# Altium PCB BMS-PCB.PcbDoc
Units mm, origin at the board's own origin, x right, y up, seen from the top; angles counter-clockwise.
Board outline 75.4 x 38.3 mm, 2 copper layers (Top Layer, Bottom Layer); 125 components, 81 nets, 331 pads, 63 vias.
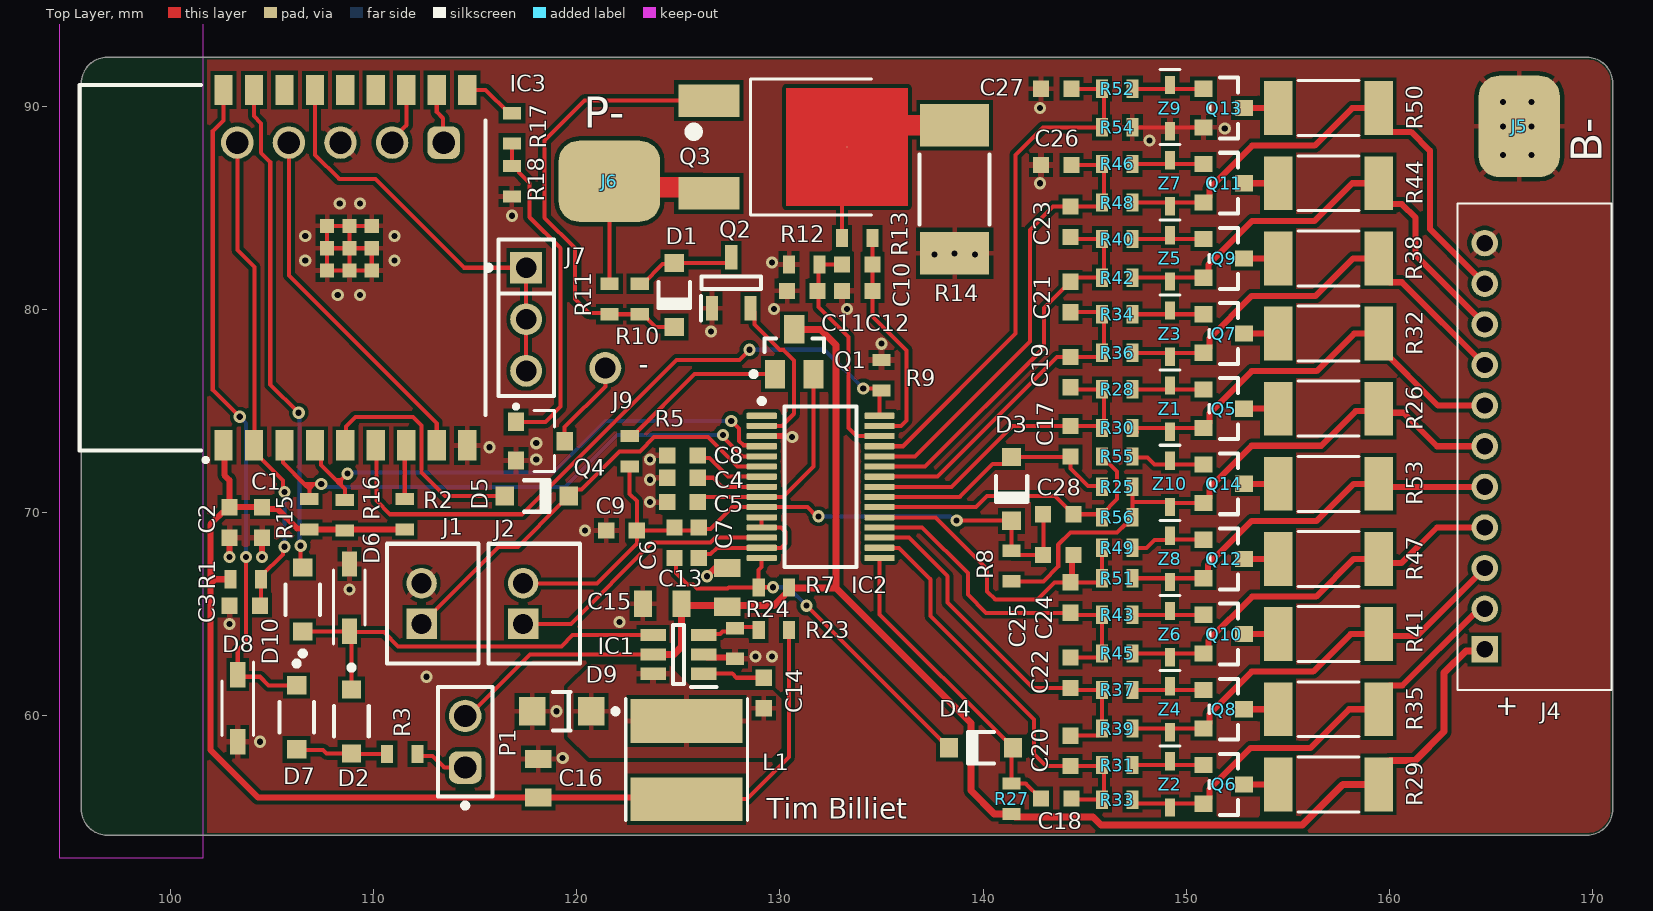
[diagram p0: Top Layer view]
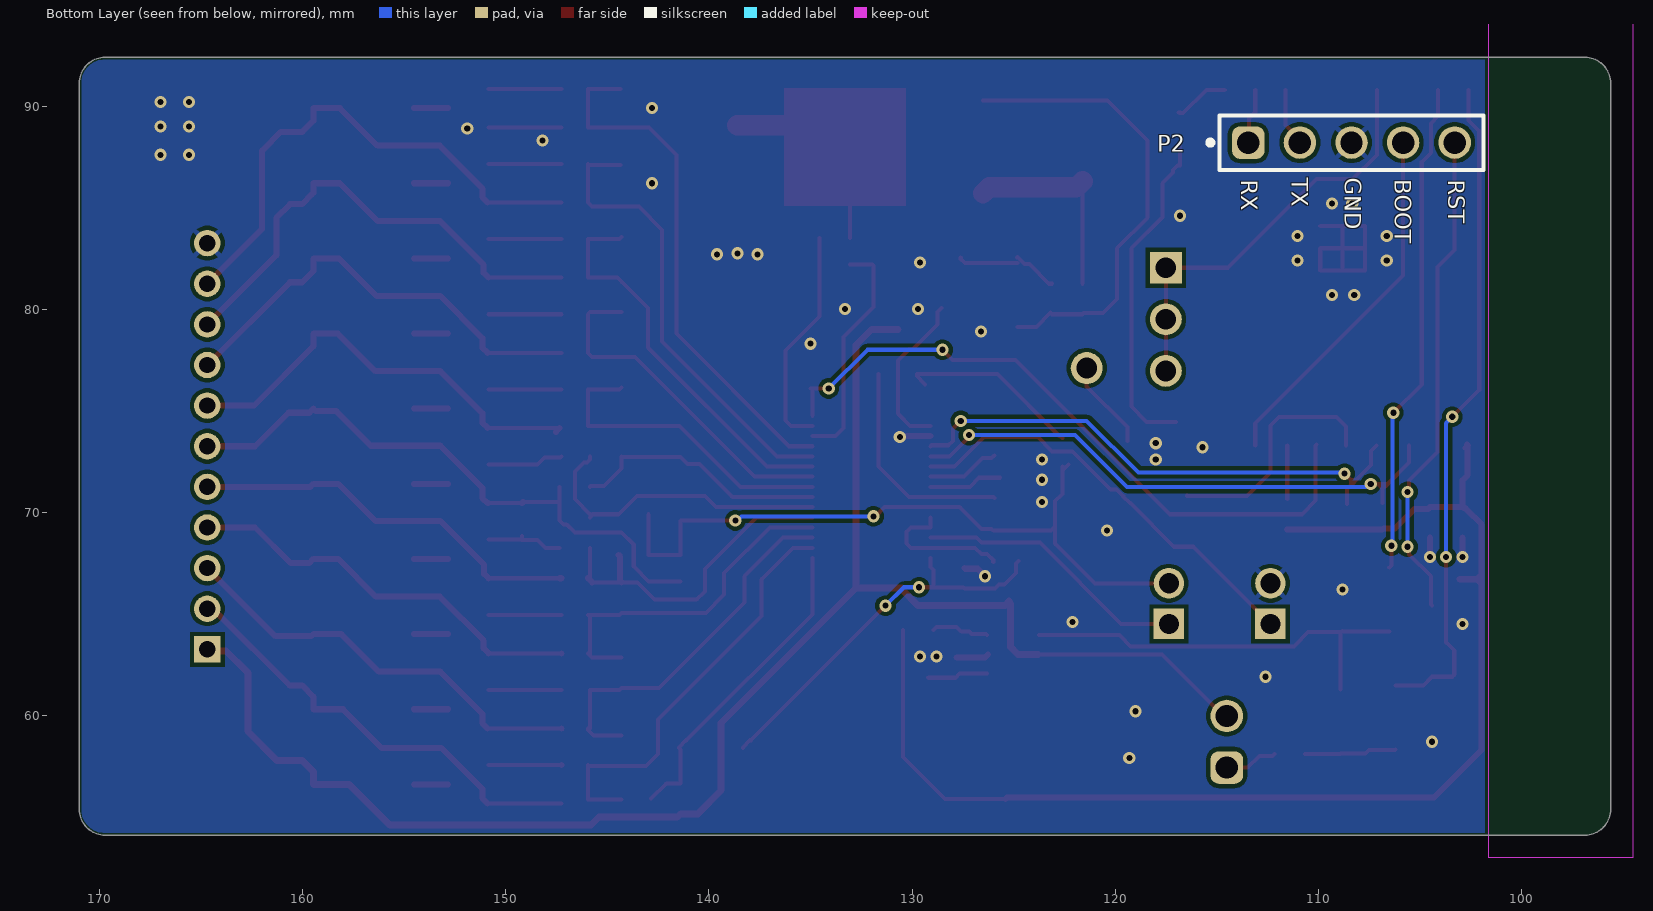
[diagram p1: Bottom Layer view, seen from below]
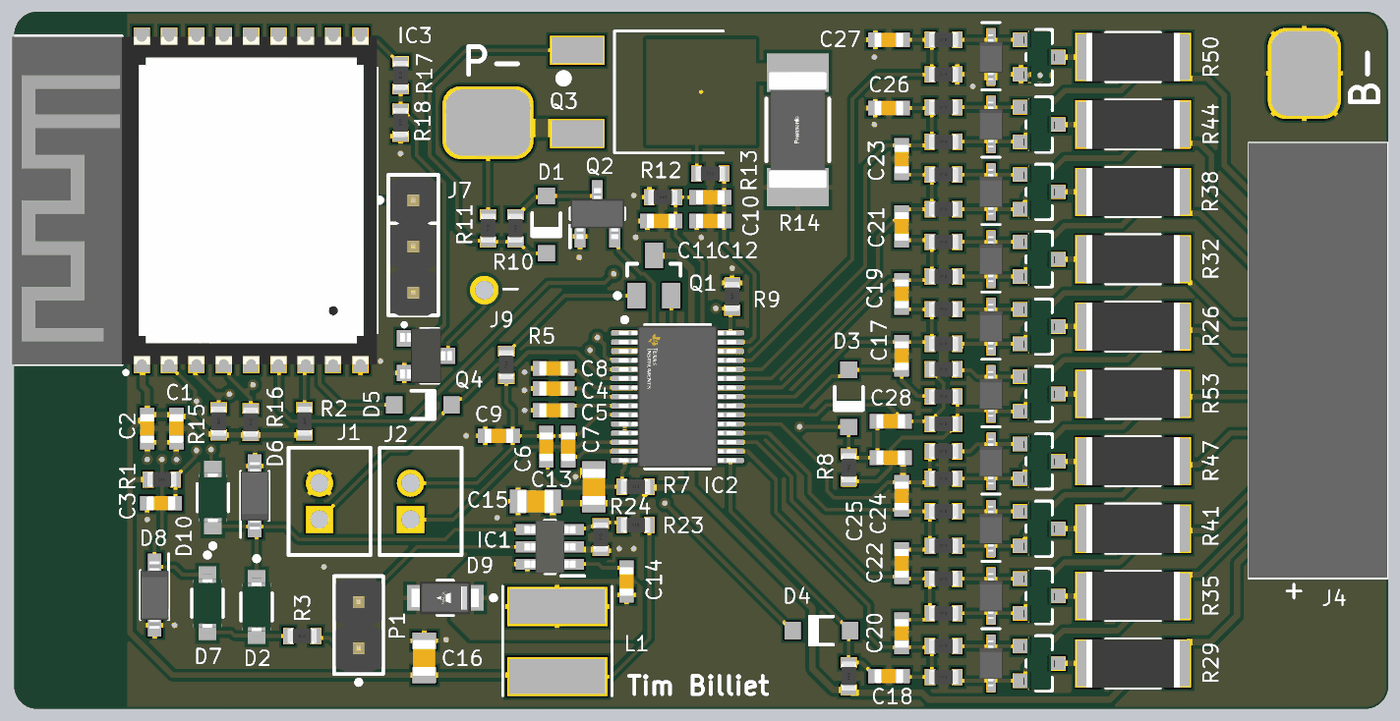
[diagram p2: 3D render of the assembled board from above, using the file's embedded part models]

## Layer stack, top to bottom
Top Solder: solder mask 0.0102, Solder Resist, Dk 3.5
Top Layer: signal copper 0.0356
Dielectric 1: dielectric 0.32, FR-4, Dk 4.8
Bottom Layer: signal copper 0.0356
Bottom Solder: solder mask 0.0102, Solder Resist, Dk 3.5

## Board outline
95.6,55.37 95.6,91.13 cw(c96.87,91.13) 96.87,92.4 169.73,92.4 cw(c169.73,91.13) 171,91.13 171,55.37 cw(c169.73,55.37) 169.73,54.1 96.87,54.1 cw(c96.87,55.37)

## Design rules (kind name [scope] priority, off if disabled: settings)
BoardOutlineClearance BoardOutlineClearance_1 [All] p1: gap=0.1 ignorepadtopadclearanceinfootprint=FALSE
Clearance Clearance_3 [All] p1: gap=0.2 ignorepadtopadclearanceinfootprint=TRUE
Clearance Clearance_1 [OnMid vs OnMid] p2: gap=0.2 ignorepadtopadclearanceinfootprint=FALSE sourcerule=43 cellrowname=All cellrowtype=0 cellcolname=All cellcoltype=0 innerlayers=TRUE
Clearance Clearance_2 [(ExistsOnLayer('Top Layer') Or ExistsOnLayer('Bottom Layer')) vs (ExistsOnLayer('Top Layer') Or ExistsOnLayer('Bottom Layer'))] p3: gap=0.2 ignorepadtopadclearanceinfootprint=FALSE sourcerule=43 cellrowname=All cellrowtype=0 cellcolname=All cellcoltype=0 outerlayers=TRUE
Clearance [All] p4: gap=0.254 ignorepadtopadclearanceinfootprint=FALSE ismatrix=TRUE
MinimumSolderMaskSliver [All] p1: minsoldermaskwidth=0.1
PasteMaskExpansion [All] p1: expansion=0 percent=-10.000000
PolygonConnect PolygonConnectStyle_1 [IsVia] p1: connectstyle=Direct reliefconductorwidth=0.254 reliefentries=2 polygonreliefangle="45 Angle" airgapwidth=0.254
PolygonConnect [All] p2: connectstyle=Relief reliefconductorwidth=0.254 reliefentries=4 polygonreliefangle="90 Angle" conductorbypadedge=TRUE mindistance=0.381 enablemindistance=FALSE airgapwidth=0.2
RoutingVias RoutingViaStyle_1 [All] p1: holewidth=0.3 width=0.6 viastyle="Through Hole" minholewidth=0.3 minwidth=0.6 maxholewidth=0.711 maxwidth=1.27
SilkToSilkClearance [All] p1: silktosilkclearance=0.15
SilkToSolderMaskClearance [IsPad] p1: minsilkscreentomaskgap=0.15 clearancetoexposedcopper=TRUE
SolderMaskExpansion SolderMaskExpansionVia [IsVia] p1: expansion=0.102 istentingtop=TRUE useseparateexpansions=TRUE expansionbottom=0.102 istentingbottom=TRUE
SolderMaskExpansion [All] p2: expansion=0.1 istentingtop=FALSE
SupplyNets "Schematic Supply Nets_2" [InNet('+3V3_MCU')] p1: voltage=0.000
SupplyNets "Schematic Supply Nets_1" [InNet('GND')] p2: voltage=0.000
SupplyNets "Schematic Supply Nets" [InNet('+3V3')] p3: voltage=0.000
Width MaxMinWidth_1 [All] p1: maxlimit=1 minlimit=0.15 preferedwidth=0.2 minimp=50.000000 maximp=50.000000 favimp=50.000000
26 further rules are at their usual default settings.

## Classes and differential pairs
component class U_Balancing: C17 C18 C19 C20 C21 C22 C23 C24 C25 C26 C27 C28 D3 D4 J4 Q5 Q6 Q7 Q8 Q9 Q10 Q11 Q12 Q13 Q14 R25 R26 R27 R28 R29 R30 R31 R32 R33 R34 R35 R36 R37 R38 R39 R40 R41 R42 R43 R44 R45 R46 R47 R48 R49 R50 R51 R52 R53 R54 R55 R56 Z1 Z2 Z3 Z4 Z5 Z6 Z7 Z8 Z9 Z10
component class ESP32-C3-WROOM-2: C1 C2 C3 D2 D6 D7 D8 D10 IC3 J7 J9 P1 P2 Q4 R1 R2 R3 R17 R18
component class BQ76930: C4 C5 C6 C7 C8 C9 C10 C11 C12 D1 D5 IC2 J1 J2 J5 J6 Q1 Q2 Q3 R5 R7 R8 R9 R10 R11 R12 R13 R14
component class "3V3 Buck Regulator": C13 C14 C15 C16 D9 IC1 L1 R23 R24
component class Topdesign: R15 R16

## Components (designator, comment, footprint, x,y, rotation, side; value= is the part's Value field where it differs from the comment)
C1 "Generic Capacitor 10uF 0603" "Wurth 0603 capacitor" 104.5,69.5 r90 top value=10uF
C2 "Generic Capacitor 100nF 0603" "Wurth 0603 capacitor" 102.9,69.5 r90 top value=100nF
C3 "Generic Capacitor 1uF 0603" "Wurth 0603 capacitor" 103.65,65.4 r0 top value=1uF
C4 "Generic Capacitor 4.7uF 0603" "Wurth 0603 capacitor" 125.2,71.7 r0 top value=4.7uF
C5 "Generic Capacitor 1uF 0603" "Wurth 0603 capacitor" 125.2,70.5 r0 top value=1uF
C6 "Generic Capacitor 10uF 0603" "Wurth 0603 capacitor" 124.8,68.5 r90 top value=10uF
C7 "Generic Capacitor 1uF 0603" "Wurth 0603 capacitor" 126,68.5 r90 top value=1uF
C8 "Generic Capacitor 1uF 0603" "Wurth 0603 capacitor" 125.2,72.8 r0 top value=1uF
C9 "Generic Capacitor 10uF 0603" "Wurth 0603 capacitor" 122.2,69.1 r0 top value=10uF
C10 "Generic Capacitor 100nF 0603" "Wurth 0603 capacitor" 133.8,82.2 r0 top value=100nF
C11 "Generic Capacitor 100nF 0603" "Wurth 0603 capacitor" 131.1,80.9 r0 top value=100nF
C12 "Generic Capacitor 100nF 0603" "Wurth 0603 capacitor" 133.8,80.9 r0 top value=100nF
C13 "Generic Capacitor 10uF 0805" "Wurth 0805 capacitor" 127.412,66.3 r270 top value=10uF
C14 "Generic Capacitor 100nF 0603" "Wurth 0603 capacitor" 129.2,61.1 r270 top value=100nF
C15 "Generic Capacitor 10uF 0805" "Wurth 0805 capacitor" 124.2,65.5 r0 top value=10uF
C16 "Generic Capacitor 22uF 0805" "Wurth 0805 capacitor" 118.1,56.9 r270 top value=22uF
C17 "Generic Capacitor 100nF 0603" "Wurth 0603 capacitor" 144.3,73.5 r270 top value=100nF
C18 "Generic Capacitor 100nF 0603" "Wurth 0603 capacitor" 143.6,55.9 r180 top value=100nF
C19 "Generic Capacitor 100nF 0603" "Wurth 0603 capacitor" 144.3,76.9 r270 top value=100nF
C20 "Generic Capacitor 100nF 0603" "Wurth 0603 capacitor" 144.3,58.25 r270 top value=100nF
C21 "Generic Capacitor 100nF 0603" "Wurth 0603 capacitor" 144.3,80.6 r270 top value=100nF
C22 "Generic Capacitor 100nF 0603" "Wurth 0603 capacitor" 144.3,62.1 r270 top value=100nF
C23 "Generic Capacitor 100nF 0603" "Wurth 0603 capacitor" 144.3,84.3 r270 top value=100nF
C24 "Generic Capacitor 100nF 0603" "Wurth 0603 capacitor" 144.3,65.8 r270 top value=100nF
C25 "Generic Capacitor 100nF 0603" "Wurth 0603 capacitor" 143.7,67.9 r0 top value=100nF
C26 "Generic Capacitor 100nF 0603" "Wurth 0603 capacitor" 143.6,87.1 r0 top value=100nF
C27 "Generic Capacitor 100nF 0603" "Wurth 0603 capacitor" 143.6,90.85 r0 top value=100nF
C28 "Generic Capacitor 100nF 0603" "Wurth 0603 capacitor" 143.7,69.9 r180 top value=100nF
D1 "1N4148W-7-F" DIOD-SOD123-2_V 124.8,80.7 r270 top
D2 "1N4148WQ-7-F" FP-SOD123-MFG 108.9,59.7 r270 top value=2pF
D3 "1N4148W-7-F" DIOD-SOD123-2_V 141.4,71.15 r270 top
D4 "1N4148W-7-F" DIOD-SOD123-2_V 139.9,58.4 r180 top
D5 "1N4148W-7-F" DIOD-SOD123-2_V 118.025,70.8 r0 top
D6 "BZT52C3V3" SOD-123 108.8,65.8 r90 top value=3,3V
D7 "1N4148WQ-7-F" FP-SOD123-MFG 106.2,59.9 r270 top value=2pF
D8 "BZT52C3V3" SOD-123 103.3,60.35 r270 top value=3,3V
D9 "V1FM10-M3/H" FP-V1FM10-M3-H-MFG 119.25,60.2 r0 top
D10 "1N4148WQ-7-F" FP-SOD123-MFG 106.5,65.7 r90 top value=2pF
IC1 "MP2459GJ-Z-MS" "Texas InstrumentsSOT95P280X110-6N" 125,63 r180 top
IC2 "BQ7693003DBTR" "Texas Instruments TSSOP-30 7.8X4.4MM" 132,71.25 r0 top
IC3 "ESP32-C3-WROOM-02-N4" "ESPRESSIF ESP32C3WROOM02N4" 108.8,83 r90 top
J1 "B2B-PH-K-S(LF)(SN)" JST-B2B-PH-K-S_V 112.9,65.5 r90 top
J2 "B2B-PH-K-S(LF)(SN)" JST-B2B-PH-K-S_V 117.9,65.5 r90 top
J4 "S11B-PH-K-S_LF__SN_" S11BPHKSLFSN 164.7,63.25 r90 top
J5 "Solder pad" "Solder Pad 4X5MM" 166.4,89 r0 top
J6 "Solder pad" "Solder Pad 4X5MM" 121.6,86.3 r90 top
J7 "3 pin header" "3 pin header 2.54mm" 117.5,74.42 r270 top
J9 "1 pin header" "1 pin header" 121.4,77.1 r0 top
L1 "COILS SMTDR54-270M" "3L COILS 5.2X5.8MM" 125.4,57.8 r90 top value=27uH
P1 "POWER ON" "2x1 2.54mm M" 114.5,58.7 r90 top
P2 "61300511121" "5x1 2.54mm" 108.36,88.2 r180 bottom
Q1 "BSS123" FAIR-SOT23-3_V 130.7,77.9 r0 top
Q2 "AO3407A" "UMW SOT23-3" 127.6,81.3 r90 top
Q3 "MDT18N20" "Minos TO-252-2L 6.3X9.6MM" 133.348,87.985 r180 top
Q4 "SI2310B-TP" "MCC SOT-23-3" 118.2,73.5 r0 top
Q5 "DMN2004K-7" "Diodes SOT23-3" 151.85,75.1 r0 top
Q6 "DMN2004K-7" "Diodes SOT23-3" 151.85,56.6 r0 top
Q7 "DMN2004K-7" "Diodes SOT23-3" 151.85,78.8 r0 top
Q8 "DMN2004K-7" "Diodes SOT23-3" 151.85,60.3 r0 top
Q9 "DMN2004K-7" "Diodes SOT23-3" 151.85,82.5 r0 top
Q10 "DMN2004K-7" "Diodes SOT23-3" 151.85,64 r0 top
Q11 "DMN2004K-7" "Diodes SOT23-3" 151.85,86.2 r0 top
Q12 "DMN2004K-7" "Diodes SOT23-3" 151.85,67.7 r0 top
Q13 "DMN2004K-7" "Diodes SOT23-3" 151.85,89.9 r0 top
Q14 "DMN2004K-7" "Diodes SOT23-3" 151.85,71.4 r0 top
R1 "Generic Resistor 10k 0603" "Wurth 0603 Resistor" 103.7,66.7 r180 top value=10k
R2 "Generic Resistor 10k 0603" "Wurth 0603 Resistor" 111.525,69.9 r270 top value=10k
R3 "Generic Resistor 30k1 0603" "Wurth 0603 Resistor" 111.4,58.1 r180 top value=30k1
R5 "CRCW060310K0FKEA" "Wurth 0603 Resistor" 122.6,73 r270 top value=100k
R7 "Generic Resistor 100R 0603" "Wurth 0603 Resistor" 129.7,66.3 r180 top value=100R
R8 "Generic Resistor 100R 0603" "Wurth 0603 Resistor" 141.4,67.35 r270 top value=100R
R9 "Generic Resistor 1M 0603" "Wurth 0603 Resistor" 135,76.75 r270 top value=1M
R10 "Generic Resistor 1M 0603" "Wurth 0603 Resistor" 123.1,80.5 r270 top value=1M
R11 "Generic Resistor 1M 0603" "Wurth 0603 Resistor" 121.6,80.5 r90 top value=1M
R12 "Generic Resistor 100R 0603" "Wurth 0603 Resistor" 131.2,82.2 r0 top value=100R
R13 "Generic Resistor 100R 0603" "Wurth 0603 Resistor" 133.8,83.5 r0 top value=100R
R14 "ERJ-M1WSF5M0U" FP-ERJM1WS-MFG 138.6,85.9 r90 top
R15 "Generic Resistor 2k2 0603" "Wurth 0603 Resistor" 106.825,69.9 r270 top value=2k2
R16 "Generic Resistor 2k2 0603" "Wurth 0603 Resistor" 108.575,69.85 r270 top value=2k2
R17 "Generic Resistor 100R 0603" "Wurth 0603 Resistor" 116.8,88.9 r270 top value=100R
R18 "Generic Resistor 10k 0603" "Wurth 0603 Resistor" 116.8,86.3 r90 top value=10k
R23 "Generic Resistor 37k4 0603" "Wurth 0603 Resistor" 129.7,64.2 r0 top value=37k4
R24 "Generic Resistor 12k 0603" "Wurth 0603 Resistor" 127.787,63.539 r90 top value=12k
R25 "CRCW060310K0FKEA" "Wurth 0603 Resistor" 146.6,71.25 r0 top value=1k
R26 "FRC2010F33R0TS" "FOJAN 2010 Resistor" 157,75.1 r0 top value=33R
R27 "CRCW060310K0FKEA" "Wurth 0603 Resistor" 141.4,55.9 r270 top value=1k
R28 "Generic Resistor 10k 0603" "Wurth 0603 Resistor" 146.6,76.05 r0 top value=10k
R29 "FRC2010F33R0TS" "FOJAN 2010 Resistor" 157,56.6 r0 top value=33R
R30 "CRCW060310K0FKEA" "Wurth 0603 Resistor" 146.6,74.15 r0 top value=1k
R31 "Generic Resistor 10k 0603" "Wurth 0603 Resistor" 146.6,57.55 r0 top value=10k
R32 "FRC2010F33R0TS" "FOJAN 2010 Resistor" 157,78.8 r0 top value=33R
R33 "CRCW060310K0FKEA" "Wurth 0603 Resistor" 146.6,55.85 r0 top value=1k
R34 "Generic Resistor 10k 0603" "Wurth 0603 Resistor" 146.6,79.75 r0 top value=10k
R35 "FRC2010F33R0TS" "FOJAN 2010 Resistor" 157,60.3 r0 top value=33R
R36 "CRCW060310K0FKEA" "Wurth 0603 Resistor" 146.6,77.85 r0 top value=1k
R37 "Generic Resistor 10k 0603" "Wurth 0603 Resistor" 146.6,61.25 r0 top value=10k
R38 "FRC2010F33R0TS" "FOJAN 2010 Resistor" 157,82.5 r0 top value=33R
R39 "CRCW060310K0FKEA" "Wurth 0603 Resistor" 146.6,59.35 r0 top value=1k
R40 "Generic Resistor 10k 0603" "Wurth 0603 Resistor" 146.6,83.45 r0 top value=10k
R41 "FRC2010F33R0TS" "FOJAN 2010 Resistor" 157,64 r0 top value=33R
R42 "CRCW060310K0FKEA" "Wurth 0603 Resistor" 146.6,81.55 r0 top value=1k
R43 "Generic Resistor 10k 0603" "Wurth 0603 Resistor" 146.6,64.95 r0 top value=10k
R44 "FRC2010F33R0TS" "FOJAN 2010 Resistor" 157,86.2 r0 top value=33R
R45 "CRCW060310K0FKEA" "Wurth 0603 Resistor" 146.6,63.05 r0 top value=1k
R46 "Generic Resistor 10k 0603" "Wurth 0603 Resistor" 146.6,87.15 r0 top value=10k
R47 "FRC2010F33R0TS" "FOJAN 2010 Resistor" 157,67.7 r0 top value=33R
R48 "CRCW060310K0FKEA" "Wurth 0603 Resistor" 146.6,85.25 r0 top value=1k
R49 "Generic Resistor 10k 0603" "Wurth 0603 Resistor" 146.6,68.25 r0 top value=10k
R50 "FRC2010F33R0TS" "FOJAN 2010 Resistor" 157,89.9 r0 top value=33R
R51 "CRCW060310K0FKEA" "Wurth 0603 Resistor" 146.6,66.75 r0 top value=1k
R52 "Generic Resistor 10k 0603" "Wurth 0603 Resistor" 146.6,90.85 r0 top value=10k
R53 "FRC2010F33R0TS" "FOJAN 2010 Resistor" 157,71.4 r0 top value=33R
R54 "CRCW060310K0FKEA" "Wurth 0603 Resistor" 146.6,88.95 r0 top value=1k
R55 "Generic Resistor 10k 0603" "Wurth 0603 Resistor" 146.6,72.75 r0 top value=10k
R56 "CRCW060310K0FKEA" "Wurth 0603 Resistor" 146.6,69.75 r0 top value=1k
Z1 "MMSZ5232BS-7-F" "Diodes SOD-323" 149.2,75.1 r270 top
Z2 "MMSZ5232BS-7-F" "Diodes SOD-323" 149.2,56.6 r270 top
Z3 "MMSZ5232BS-7-F" "Diodes SOD-323" 149.2,78.8 r270 top
Z4 "MMSZ5232BS-7-F" "Diodes SOD-323" 149.2,60.3 r270 top
Z5 "MMSZ5232BS-7-F" "Diodes SOD-323" 149.2,82.5 r270 top
Z6 "MMSZ5232BS-7-F" "Diodes SOD-323" 149.2,64 r270 top
Z7 "MMSZ5232BS-7-F" "Diodes SOD-323" 149.2,86.2 r270 top
Z8 "MMSZ5232BS-7-F" "Diodes SOD-323" 149.2,67.7 r270 top
Z9 "MMSZ5232BS-7-F" "Diodes SOD-323" 149.2,89.9 r270 top
Z10 "MMSZ5232BS-7-F" "Diodes SOD-323" 149.2,71.4 r270 top

## Footprints (in the part's own frame and the unit in brackets; to place one, negate y for a bottom-side part, rotate by r counter-clockwise, add the part's x,y. Pads: shape width x height; smd on the part's side, far side on the other; paste and mask are expansions set on the pad)
"1 pin header" [mm]
  round 1.57 hole 1.02 paste-2539.97 mask+0: 1(0,0)
"2x1 2.54mm M" [mm] "Pin Header, pitch 2.54 mm, THT, Vertical, single row, 2p"
  rrect50% 1.6x1.6 hole 1.1: 1(-1.27,0)
  round 1.6 hole 1.1: 2(1.27,0)
  silkscreen extent -3.26,-1.35 2.69,1.35, body extent -2.54,-1.27 2.54,1.27, height 8.57
"3 pin header 2.54mm" [mm]
  rect 1.57x1.57 hole 1.02 paste-2539.97 mask+0: 1(-7.62,0)
  round 1.57 hole 1.02 paste-2539.97 mask+0: 2(-5.08,0) 3(-2.54,0)
  silkscreen extent -9.02,-1.97 -1.3,1.37, body extent -8.89,-1.27 -1.27,1.27, height 8.56
"3L COILS 5.2X5.8MM" [mm]
  rect 2.15x5.5 smd paste-0.12 mask+0.1: 1(1.925,0) 2(-1.925,0)
  silkscreen extent -2.98,-3 3.03,3
"5x1 2.54mm" [mm] "Pin Header, pitch 2.54 mm, THT, Vertical, single row, 5p"
  rrect50% 1.6x1.6 hole 1.1: 1(-5.08,0)
  round 1.6 hole 1.1: 2(-2.54,0) 3(0,0) 4(2.54,0) 5(5.08,0)
  silkscreen extent -7.07,-1.35 6.5,1.35
DIOD-SOD123-2_V [mm] "SOD123, 2-Leads, Body 2.7x1.55mm, Height 1.45mm"
  rect 0.9x0.95 smd: 1(-1.575,0) 2(1.575,0)
  silkscreen extent -0.64,-0.82 0.64,0.77, body extent -1.35,-0.77 1.35,0.77, height 1.45
"Diodes SOD-323" [mm]
  rect 0.9x0.5 smd paste-0.025 mask+0.1: 1(-1.137,0) 2(1.137,0)
  silkscreen extent -1.9,-0.5 -1.9,0.5, body extent -1.25,-0.65 1.25,0.65, height 1.2
"Diodes SOT23-3" [mm]
  rect 0.9x0.8 smd paste-0.033 mask+0.1: 1(-1,0.95) 2(-1,-0.95) 3(1,0)
  silkscreen extent -0.7,-1.5 0.7,1.5, body extent -1.55,-1.6 1.55,1.6, height 0.25
"ESPRESSIF ESP32C3WROOM02N4" [mm]
  rect 1.5x0.9 smd paste-0.044 mask+0.1: 1(-9.71,6.2) 2(-9.71,4.7) 3(-9.71,3.2) 4(-9.71,1.7) 5(-9.71,0.2) 6(-9.71,-1.3) 7(-9.71,-2.8) 8(-9.71,-4.3) 9(-9.71,-5.8) 10(7.79,-5.8) 11(7.79,-4.3) 12(7.79,-2.8) 13(7.79,-1.3) 14(7.79,0.2) 15(7.79,1.7) 16(7.79,3.2) 17(7.79,4.7) 18(7.79,6.2)
  rect 0.7x0.7 smd paste-0.027 mask+0.1: 19(-1.1,-1.1) 19(-1.1,0) 19(-1.1,1.1) 19(0,1.1) 19(0,0) 19(0,-1.1) 19(1.1,-1.1) 19(1.1,0) 19(1.1,1.1)
  silkscreen extent -10.53,-6.7 8.04,13.3, body extent -9.97,-6.7 8.03,13.3, height 3.2
FAIR-SOT23-3_V [mm] "SOT23, 3-Leads, Body 2.92x1.3mm, Pitch 0.95mm"
  rect 1x1.4 smd: 1(-0.95,-1.1) 2(0.95,-1.1) 3(0,1.1)
  silkscreen extent -2.12,-1.22 1.46,0.65, body extent -1.46,-0.65 1.46,0.65, height 1.2
"FOJAN 2010 Resistor" [mm] "FChip Resistor, 2-Leads, Body 5,00x2,50mm, IPC Medium Density"
  rect 1.4x2.65 smd paste-0.071 mask+0.1: 1(-2.475,0) 2(2.475,0)
  silkscreen extent -1.5,-1.35 1.5,1.35, body extent -2.55,-1.33 2.55,1.33, height 0.65
FP-ERJM1WS-MFG [mm]
  rect 2.1x3.4 smd paste+0 mask+0: 1(-3.15,0) 2(3.15,0)
  silkscreen extent -1.73,-1.73 1.73,1.73, body extent -4.3,-1.83 4.3,1.83, height 0.25
FP-SOD123-MFG [mm]
  rect 0.9x0.95 smd paste+0 mask+0: 1(-1.575,0) 2(1.575,0)
  silkscreen extent -2.77,-0.85 0.75,0.85, body extent -2.12,-0.95 2.12,0.95, height 0.25
FP-V1FM10-M3-H-MFG [mm]
  rect 1.3x1.4 smd paste+0 mask+0: 1(1.45,0) 2(-1.45,0)
  silkscreen extent -0.43,-0.95 2.78,0.95, body extent -2.2,-1.05 2.2,1.05, height 0.25
JST-B2B-PH-K-S_V [mm] "Connector, 2-Leads, Body 5.9x4.5mm, Pitch 2mm"
  rect 1.5x1.5 hole 1: 1(-1,0.55)
  round 1.5 hole 1: 2(1,0.55)
  silkscreen extent -2.95,-2.25 2.95,2.25, body extent -2.95,-2.25 2.95,2.25, height 6
"MCC SOT-23-3" [mm]
  rect 0.8x0.9 smd: 1(-1.2,0.95) 2(-1.2,-0.95) 3(1.2,0)
  silkscreen extent -1.3,-1.5 0.7,1.8, body extent -1.42,-1.5 1.42,1.5, height 1.2
"Minos TO-252-2L 6.3X9.6MM" [mm]
  rect 3x1.6 smd paste-0.081 mask+0.1: 1(6.847,-2.285) 3(6.848,2.285)
  round 0.025 smd paste-0.26 mask+0.1: 2(0.05,0)
  Top Layer region: -2.95,2.9 -2.95,-2.9 3.05,-2.9 3.05,2.9
  silkscreen extent -1.16,-3.35 7.8,3.35, body extent -1.79,-3.25 6.91,3.25, height 2.3
S11BPHKSLFSN [mm]
  rect 1.3x1.3 hole 0.8: 1(0,0)
  round 1.3 hole 0.8: 2(2,0) 3(4,0) 4(6,0) 5(8,0) 6(10,0) 7(12,0) 8(14,0) 9(16,0) 10(18,0) 11(20,0)
  silkscreen extent -2,-6.25 21.95,1.35, body extent -1.95,-6.25 21.95,1.35, height 4.9
SOD-123 [mm]
  rect 1.25x0.75 smd: 1(-1.65,0) 2(1.65,0)
  silkscreen extent -2.27,-0.77 1.35,0.77, body extent -1.85,-0.77 1.85,0.77, height 1.35
"Solder Pad 4X5MM" [mm]
  rrect50% 4x5 smd paste-0.174 mask+0.1: 1(0,0)
"Texas Instruments TSSOP-30 7.8X4.4MM" [mm]
  rrect33% 1.5x0.3 smd paste-0.006 mask+0.05: 1(-2.9,3.5) 2(-2.9,3) 3(-2.9,2.5) 4(-2.9,2) 5(-2.9,1.5) 6(-2.9,1) 7(-2.9,0.5) 8(-2.9,0) 9(-2.9,-0.5) 10(-2.9,-1) 11(-2.9,-1.5) 12(-2.9,-2) 13(-2.9,-2.5) 14(-2.9,-3) 15(-2.9,-3.5) 16(2.9,-3.5) 17(2.9,-3) 18(2.9,-2.5) 19(2.9,-2) 20(2.9,-1.5) 21(2.9,-1) 22(2.9,-0.5) 23(2.9,0) 24(2.9,0.5) 25(2.9,1) 26(2.9,1.5) 27(2.9,2) 28(2.9,2.5) 29(2.9,3) 30(2.9,3.5)
  silkscreen extent -3.02,-3.95 1.78,4.35, body extent -3.75,-4.05 3.75,4.05, height 0.25
"Texas InstrumentsSOT95P280X110-6N" [mm]
  rect 1.25x0.6 smd: 1(-1.25,0.95) 2(-1.25,0) 3(-1.25,-0.95) 4(1.25,-0.95) 5(1.25,0) 6(1.25,0.95)
  silkscreen extent -1.88,-1.45 0.28,1.6, body extent -1.4,-1.45 1.4,1.45, height 0.97
"UMW SOT23-3" [mm]
  rect 1.2x0.6 smd: 1(-1.25,0.95) 2(-1.25,-0.95) 3(1.25,0)
  silkscreen extent -1.85,-1.48 0.3,1.5, body extent -1.4,-1.48 1.4,1.48, height 1.25
"Wurth 0603 capacitor" [mm] "Ceramic Capacitors, body 1.6x0.8mm"
  rect 0.8x0.8 smd: 1(-0.75,0) 2(0.75,0)
  body extent -0.8,-0.4 0.8,0.4, height 0.8
"Wurth 0603 Resistor" [mm] "Fixed Thick Film, body 1.60 x 0.80 mm"
  rect 0.6x0.9 smd paste-0.028 mask+0.1: 1(-0.75,0) 2(0.75,0)
  body extent -0.8,-0.4 0.8,0.4, height 0.45
"Wurth 0805 capacitor" [mm] "Ceramic Capacitors, body 2x1.25mm"
  rect 0.9x1.3 smd: 1(-0.95,0) 2(0.95,0)
  body extent -1,-0.63 1,0.63, height 1.25

## Part data
D1 D3 D4 D5: library part CMP-2000-04932-2, "Fast Switching Diode, 100 V, 0.15 A, -65 to 150 degC, 2-Pin?SOD123, RoHS, Tape and Reel", If - Forward Current=0.15A, Ir - Reverse Current=1uA, Manufacturer=DiodesIncorporated, Max Surge Current=2A, Maximum Operating Temperature=+150C, Minimum Operating Temperature=-65C, Operating Temperature Range=-65Cto+150C, Package / Case=SOD-123, Package Reference=SOD123-2, Peak Reverse Voltage=100V, Vf - Forward Voltage=1.25V, Brand=DiodesIncorporated, Configuration=Single, Datasheet URL=http://www.farnell.com/datasheets/1915529.pdf, Datasheet Version="Rev. 24-2, 10/2013", Factory Pack Quantity=3000, Height=1.25mm, Length=2.85mm, Manufacturer URL=http://www.diodes.com/, Mounting Style=SMD/SMT, Package URL=http://www.diodes.com/datasheets/ds18004.pdf, Packaging=Reel, Product=SwitchingDiodes, Product Category=Diodes-GeneralPurpose,Power,Switching, Recovery Time=4ns, RoHS=True, Series=1N4148, Type=SwitchingDiode, Unit Weight=0.000353oz, Width=1.7mm
D2 D7 D10: library part CMP-12791-000025-1, "DIODE GEN PURP 100V 300MA SOD123", Capacitance=2pF, Forward Current=300mA, Manufacturer="Diodes Inc.", Max Junction Temp=+150°C, Max Repetitive Reverse Voltage=100V, Max Surge Forward Current=1A, Package=SOD123, Peak Reverse Current=1uA, Temperature="-65°C to +150°C", Temperature Range Low=-65°C, Automotive=Yes, Automotive Grade="Grade 0", Category=Diode, ComponentLink2Description=Datasheet, ComponentLink2URL=https://www.diodes.com/assets/Datasheets/ds30086.pdf, Device Class L1="Discrete Semiconductors", Device Class L2=Diodes, Device Class L3="Rectifier Diodes", Digikey Description="DIODE GEN PURP 100V 300MA SOD123", Footprint Url=https://www.diodes.com/assets/Package-Files/SOD123.pdf, Height=1.45mm, Ipc Land Pattern Name=SOD365155X123-2, Lead Free=Yes, Manufacturer Part Number=1N4148WQ-7-F, Mouser Description="Diode Switching 100V 0.15A Automotive 2-Pin SOD-123 T/R", Octopart=https://octopart.com/1n4148wq-7-f-diodes+inc.-34965875, Reverse Voltage=100V, RoHS=TRUE, Standoff Height=0mm, Temperature Range High=+150°C
D6 D8: library part "GOODWORK BZT52C3V3"
D9: library part CMP-02539-000045-1, "1A 100V SMF TRENCH SKY RECT", RoHS Compliant=Yes
IC1: library part "MSKSEMI MP2459GJ-Z-MS", "Buck Converter 4.5V-60V 600mA"
IC2: library part "Texas instruments BQ7693003DBTR", "Power Supply Support Circuit, Adjustable, 1 Channel, PDSO30", Case/Package=TSSOP, Manufacturer="Texas Instruments", Max Operating Temperature=85°C, Max Supply Voltage=25V, Min Operating Temperature=-40°C, Min Supply Voltage=6V, Nominal Supply Current=40-130uA, Package=DBT0030A, Package Body Material=Plastic, Package Shape=Rectangular, Package Style="SMALL OUTLINE, THIN PROFILE, SHRINK PITCHMeter", Peak Reflow Temperature (Cel)=260°C, Supplier Part Number=595-BQ7693003DBTR, Temperature="-40°C to +85°C", Temperature Grade=INDUSTRIAL, Temperature Range High=+85°C, Adjustable Threshold=Yes, Automotive=No, Category=IC, Channels=1, ComponentLink1Description=https://www.ti.com:443/lit/ds/symlink/bq76920.pdf?src-supplier=IHS+Markit, ComponentLink1URL=https://www.ti.com:443/lit/ds/symlink/bq76920.pdf?src-supplier=IHS+Markit, ComponentLink2Description=Datasheet, ComponentLink2URL=http://www.ti.com/lit/ds/symlink/bq76930.pdf, ComponentLink3Description=http://www.ti.com/lit/gpn/bq76930?src-supplier=Mouser, ComponentLink3URL=http://www.ti.com/lit/gpn/bq76930?src-supplier=Mouser, ComponentLink4Description=http://www.ti.com/lit/ds/symlink/bq76930.pdf?src-supplier=Digikey, ComponentLink4URL=http://www.ti.com/lit/ds/symlink/bq76930.pdf?src-supplier=Digikey, ComponentLink5Description=http://www.ti.com/lit/pdf/slpt038?src-supplier=Digikey, ComponentLink5URL=http://www.ti.com/lit/pdf/slpt038?src-supplier=Digikey, ComponentLink6Description=http://www.ti.com/general/docs/lit/getliterature.tsp?genericPartNumber=BQ76920&&fileType=pdf&src-supplier=Avnet, ComponentLink6URL=http://www.ti.com/general/docs/lit/getliterature.tsp?genericPartNumber=BQ76920&&fileType=pdf&src-supplier=Avnet, Device Class L1="Integrated Circuits (ICs)", Device Class L2="Power Management ICs", Device Class L3="Battery Management", Digikey Description="IC BATT MGMT LI-ION AFE 30TSSOP", Height=1.2mm, Height - Seated (Max)=1.2mm, Ipc Land Pattern Name=SOP50P635X120-30, JESD-609 Code=e4, Lead Free=Yes, Length=7.8mm, Manufacturer Part Number=BQ7693003DBTR, Moisture Sensitivity Level=2, Mouser Description="6 to 10-Series Cell Li-Ion and Li-Phosphate Battery Monitor (bq76940 Family) 30-TSSOP -40 to 85", Number of Cells=10, Number of Channels=1, Number of Outputs=2, Octopart=https://octopart.com/bq7693003dbtr-texas+instruments-34472212, Pins=30, Pricing="1=3,18, 10=2,75, 50=2,75, 100=2,54, 1000=2,15, 10000=1,96 (USD)", Reach SVHC Compliant=Yes, RoHS=TRUE, RoHS Compliant=Yes, Standoff Height=0.05mm, Stock=4010, Supplier=Mouser, Surface Mount=Yes, Temperature Range Low=-40°C, Terminal Finish=Nickel, Terminal Form="Gull Wing", Terminal Pitch=0.5mm, Terminal Position=DUAL, Throw Configuration="POWER SUPPLY SUPPORT CIRCUIT", Width=4.4mm
IC3: library part "Espressif ESP32-C3-WROOM-02-N4", "Integrated Circuit", Manufacturer_Name="Espressif Systems", Mouser Part Number=356-ESP32C3WROOM02N4, Datasheet Link=https://www.mouser.ch/datasheet/2/891/Espressif_ESP32_C3_WROOM_02-2006871.pdf, Height=3.35mm, Manufacturer_Part_Number=ESP32-C3-WROOM-02-N4, Mouser Price/Stock=https://www.mouser.co.uk/ProductDetail/Espressif-Systems/ESP32-C3-WROOM-02-N4?qs=stqOd1AaK7%2FqjTZKEOgfUg%3D%3D, Supplier=Mouser, Supplier Part Number=356-ESP32C3WROOM02N4
J1 J2: library part CMP-2000-05162-1, "Male Header, Pitch 2 mm, 1 x 2 Position, Height 6 mm, Tail Length 3.4 mm, -25 to 85 degC, RoHS, Bulk", Manufacturer=JST, Datasheet URL=http://datasheet.octopart.com/B2B-PH-K-S%28LF%29%28SN%29-JST-datasheet-8324864.pdf, Datasheet Version=Nov-08, Manufacturer URL=http://www.jst.com/home2.html, No of Positions=2, Pitch=2mm, Style/Orientation=StraightHeader/Plug, Termination=Crimp, Type=ShroudedHeader
J4: "Connector", Arrow Part Number=S11B-PH-K-S(LF)(SN), Manufacturer_Name="JST (JAPAN SOLDERLESS TERMINALS)", Arrow Price/Stock=https://www.arrow.com/en/products/s11b-ph-k-s-lf-sn/jst-manufacturing, Datasheet Link=http://www.farnell.com/datasheets/2057211.pdf, Height=4.8mm, Manufacturer_Part_Number=S11B-PH-K-S(LF)(SN)
L1: library part "3L COILS SMTDR54-270M inductor", Manufacturer="3L Coils"
P1: library part 2P, "WR-PHD Pin Header, THT, Vertical, pitch 2.54mm, 1 Row, 2P", Contact Resistance=20mOhm, Manufacturer="Wurth Elektronik", Manufacturer Part Number=61300211121, Operating Temperature Max=105°C, Operating Temperature Min=-40°C, Rated Current=3A, Withstanding Voltage=500V, Working Voltage=250V, Category="Board-to-Board Connectors", ComponentLink1Description="Website Link", ComponentLink1URL=https://www.we-online.com/redexpert/article/61300211121?ad, ComponentLink2Description="Datasheet Link", ComponentLink2URL=https://www.we-online.com/redexpert/spec/61300211121?ad, Gender="Pin Header", Match Code=WR-PHD, Mount="Through Hole", Number of Pins=2, Number of Rows=1, Orientation=Vertical, Packaging=Bag, Pitch=2.54mm
P2: library part 5P, "WR-PHD Pin Header, THT, Vertical, pitch 2.54mm, 1 Row, 5P", Contact Resistance=20mOhm, Manufacturer="Wurth Elektronik", Operating Temperature Max=105°C, Operating Temperature Min=-40°C, Rated Current=3A, Withstanding Voltage=500V, Working Voltage=250V, Category="Board-to-Board Connectors", ComponentLink1Description="Website Link", ComponentLink1URL=https://www.we-online.com/redexpert/article/61300511121?ad, ComponentLink2Description="Datasheet Link", ComponentLink2URL=https://www.we-online.com/redexpert/spec/61300511121?ad, Gender="Pin Header", Manufacturer Part Number=61300511121, Match Code=WR-PHD, Mount="Through Hole", Number of Pins=5, Number of Rows=1, Orientation=Vertical, Packaging=Bag, Pitch=2.54mm
Q1: library part CMP-2000-04934-1, "N-Channel Logic Level Enhancement Mode Field Effect Transistor, 1.7 V, -55 to 150 degC, 3-Pin SOT-23, RoHS, Tape and Reel", Manufacturer=Fairchild, Maximum Continuous Drain Current=0.17A, Maximum Drain Source Voltage=100V, Maximum Gate Source Voltage=±20V, Operating Temperature=-55to150degC, Package=3SOT-23, Package Description="3-Pin Small Outline Transistor, Body 2.92 x 1.325 mm, Pitch 0.95 mm", Package Reference=SOT23-3, Package Version="Rev. 12, 03/2016", Category=MOSFET, Channel Mode=Enhancement, Channel Type=N, Datasheet URL=https://www.fairchildsemi.com/datasheets/BS/BSS123.pdf, Datasheet Version=Jun-03, Manufacturer URL=https://www.fairchildsemi.com/, Mounting=SurfaceMount, Package URL=http://www.fairchildsemi.com/dwg/MA/MA03D.pdf, Packaging=Tape&Reel, Rad Hard=No, RDS-on=6000@10VmOhm, Typical Fall Time=2.4ns, Typical Rise Time=9ns, Typical Turn-Off Delay Time=17ns, Typical Turn-On Delay Time=1.7ns
Q2: library part "UMW AO3407A", "MOSFET (P-Channel)", Manufacturer_Name="Alpha & Omega Semiconductors", Arrow Part Number=AO3407A, Arrow Price/Stock=https://www.arrow.com/en/products/ao3407a/alpha-and-omega-semiconductor?region=nac, Datasheet Link=http://www.aosmd.com/pdfs/datasheet/ao3407a.pdf, Height=1.25mm, Manufacturer_Part_Number=AO3407A
Q3: library part "Minos MDT18N20", "VDS = 200V,ID = 18A, VGS=30V"
Q4: library part "MCC SI2310B-TP", "Power Field-Effect Transistor", Manufacturer=MCC, Supplier Part Number=353-SI2310B-TPCT-ND, Manufacturer Part Number=SI2310B-TP, Pricing="1=0,36, 10=0,255, 100=0,1286, 500=0,10488, 1000=0,07782 (USD)", RoHS=Yes, Stock=114263, Supplier=Digikey
Q5 Q6 Q7 Q8 Q9 Q10 Q11 Q12 Q13 Q14: library part "Diodes DMN2004K-7", "MOSFET N-CH 20V 0.63A SOT23-3", Continuous Drain Current=630mA, Drain To Source Breakdown Voltage=20V, Drain to Source Resistance=0.4Ω, Gate To Source Voltage=8V, Input Capacitace At Vds="150pF @ 16V", Manufacturer="Diodes Inc.", Max Forward Diode Voltage=1V, Max Junction Temp=+150°C, Package=SOT23, Power Dissipation=350mW, Pulse Drain Current=1.5A, Temperature="-65°C to +150°C", Temperature Range Low=-65°C, Automotive=Yes, Automotive Grade="Grade 0", Category=Trans, ComponentLink2Description=Datasheet, ComponentLink2URL=https://www.diodes.com/assets/Datasheets/ds30938.pdf, Depletion Mode=False, Device Class L1="Discrete Semiconductors", Device Class L2=Transistors, Device Class L3=MOSFETs, Digikey Description="MOSFET N-CH 20V 0.63A SOT23-3", Drain To Source Voltage=20V, Footprint Url=https://www.diodes.com/assets/Package-Files/SOT23.pdf, Gate Charge At Vgs="0.9nC @ 4.5V", Height=1.1mm, Lead Free=Yes, Manufacturer Part Number=DMN2004K-7, Mouser Description="MOSFET 20V 540mA", Number of Channels=1, Number Of N Channels=1, Octopart=https://octopart.com/dmn2004k-7-diodes+inc.-7127688, Reverse Recovery Charge=0.85nC, Reverse Recovery Time=5.5ns, RoHS=TRUE, Rthja Max=357°C/W, Standoff Height=0.013mm, Temperature Range High=+150°C, Threshold Vgs Max=1V, Threshold Vgs Min=0.5V, Turn Off Delay Time=59.4ns, Turn On Delay Time=5.7ns
R5: library part "Generic Resistor 100k 0603"
R14: library part CMP-05422-000103-1, "RES 0.005 OHM 1% 1W 2512", Case Code (Imperial)=2512, Case Code (Metric)=6432, Max Operating Temperature=170°C, Max Power Dissipation=1W, Min Operating Temperature=-55°C, Package Quantity=1, Resistance=5mR, Resistance Tolerance=1%, Resistor Type="Metal Strip", Temperature Coefficient=100ppm/°C, Case/Package=2512, Construction=Rectangular, Contact Plating=Tin, Depth=3.2mm, Height=0.8mm, Lead Free="Lead Free", Length=6.4mm, Military Standard=Not, Mount="Surface Mount", Number of Pins=2, Number of Terminations=2, Packaging="Tape and Reel", Power Rating=1W, Radiation Hardening=No, REACH SVHC="No SVHC", RoHS Compliant=Yes, Series=ERJ, Size Code=2512, Technology="THICK FILM", Termination=SMD/SMT, Tolerance=1%, Width=3.2mm
R25 R27 R30 R33 R36 R39 R42 R45 R48 R51 R54 R56: library part "Generic Resistor 1k 0603"
R26 R29 R32 R35 R38 R41 R44 R47 R50 R53: library part "FOJAN FRC2010F33R0TS", "33ohm ±1% 200V ±100ppm/℃ , 750mW, 1010", Manufacturer=Fojan
Z1 Z2 Z3 Z4 Z5 Z6 Z7 Z8 Z9 Z10: library part "Diodes MMSZ5232BS-7-F", "Zener Diode", Manufacturer_Name="Diodes Incorporated", Mouser Part Number=621-MMSZ5232BS-F, Arrow Part Number=MMSZ5232BS-7-F, Arrow Price/Stock=https://www.arrow.com/en/products/mmsz5232bs-7-f/diodes-incorporated?region=nac, Datasheet Link=https://www.diodes.com/assets/Datasheets/ds31038.pdf, Height=1.2mm, Manufacturer_Part_Number=MMSZ5232BS-7-F, Mouser Price/Stock=https://www.mouser.co.uk/ProductDetail/Diodes-Incorporated/MMSZ5232BS-7-F?qs=4u4ada%252BXaA6tF4wEjgPe2w%3D%3D

## Via types
v1: diameter 0.6, hole 0.3, Top Layer to Bottom Layer, tented both sides, 63 vias

## Nets (pads, with @x,y where several pads share a name; then routed paths per layer and width w, separated by ;. In a path a pad name is that pad's centre, name@x,y a point inside that pad or via, vN(x,y) a via of type N, cw(c..) or ccw(c..) an arc to the next point about the centre after c; other vN are vias at no path point)
4.2V: J4.10 Q11.2 R48.2 R50.2 Z7.2 | length 25.8
  Top Layer w0.2: R48.2@147.25,85.25 149.2,85.25 Q11.2@150.9,85.25
  Top Layer w0.3: Q11.2@150.9,85.25 151.15,85.5 151.15,85.95 153.25,88.05 156.325,88.05 158.175,89.9 R50.2 159.475,89.275 160.025,88.725 161.075,88.725 162,87.8 162,83.95 J4.10
8.4V: J4.9 Q9.2 R42.2 R44.2 Z5.2 | length 23.9
  Top Layer w0.2: R42.2@147.25,81.55 149.2,81.55 Q9.2
  Top Layer w0.3: Q9.2 151.093,81.793 151.093,82.193 153.25,84.35 156.325,84.35 158.175,86.2 R44.2 159.475,85.726 159.55,85.65 160.025,85.176 160.624,85.176 161.3,84.5 161.3,82.65 J4.9
12.6V: J4.8 Q7.2 R36.2 R38.2 Z3.2 | length 22.2
  Top Layer w0.2: R36.2@147.25,77.85 149.2,77.85 Q7.2@150.9,77.85
  Top Layer w0.3: Q7.2@150.9,77.85 151.15,78.1 151.15,78.575 153.225,80.65 156.375,80.65 158.225,82.5 R38.2 159.475,81.875 160.025,81.325 160.625,81.325 J4.8
16.8V: J4.7 Q5.2 R30.2 R32.2 Z1.2 | length 21.6
  Top Layer w0.2: R30.2 Q5.2
  Top Layer w0.3: R30.2 R30.2@147.537,73.963 ; Q5.2@150.9,74.15 151.15,74.4 151.15,74.875 153.225,76.95 156.425,76.95 158.275,78.8 R32.2 159.475,78.175 162.4,75.25 J4.7
21V: J4.6 Q14.2 R8.2 R25.2 R26.2 R56.2 Z10.2 | length 29.8
  Top Layer w0.2: R8.2 142.975,66.6 143.7,67.325 143.7,68.4 144.3,69 146.6,69 147,69.4 147.15,69.4 147.35,69.6 R56.2 147.35,70.5 ; R25.2 147.35,70.5 ; Z10.2@149.15,70.5 147.35,70.5 ; Z10.2@149.2,70.45 Q14.2
  Top Layer w0.3: Z10.2@149.15,70.5 Z10.2@149.2,70.45 ; Q14.2 150.9,70.45 151.15,70.7 151.15,71.2 153.225,73.275 156.65,73.275 158.351,74.976 159.351,74.976 R26.2 159.675,74.9 160.7,74.9 162.35,73.25 J4.6
25.2V: J4.5 Q12.2 R51.2 R53.2 Z8.2 | length 19.7
  Top Layer w0.2: R51.2 Q12.2
  Top Layer w0.3: R51.2@147.25,66.75 R51.2 ; Q12.2 151.068,66.968 151.068,67.418 153.225,69.575 156.425,69.575 158.25,71.4 R53.2 159.625,71.25 J4.5
29.4V: J4.4 Q10.2 R45.2 R47.2 Z6.2 | length 20.4
  Top Layer w0.2: R45.2@147.25,63.05 149.2,63.05 Q10.2
  Top Layer w0.3: Q10.2 151.093,63.293 151.093,63.693 153.25,65.85 156.4,65.85 158.25,67.7 R47.2 159.675,67.5 160.6,67.5 162.35,69.25 J4.4
33.6V: J4.3 Q8.2 R39.2 R41.2 Z4.2 | length 21.1
  Top Layer w0.2: R39.2@147.25,59.35 149.2,59.35 Q8.2@150.9,59.35
  Top Layer w0.3: Q8.2@150.9,59.35 151.15,59.6 151.15,60.075 153.225,62.15 156.25,62.15 158.1,64 R41.2 159.575,63.9 161.35,63.9 J4.3
37.8V: J4.2 Q6.2 R33.2 R35.2 Z2.2 | length 22.1
  Top Layer w0.2: R33.2@147.25,55.65 149.2,55.65 Q6.2@150.896,55.65
  Top Layer w0.3: Q6.2@150.896,55.65 151.146,55.9 151.146,56.371 153.175,58.4 156.125,58.4 158.025,60.3 R35.2 159.475,60.925 160.025,61.475 160.65,61.475 164.234,65.059 164.509,65.059 J4.2
42V_REG: C5.2 IC2.9 Q1.2 | length 10.9
  Top Layer w0.2: C5.2@125.95,70.7 126,70.75 IC2.9 130.15,70.75 131.65,72.25 Q1.2
+3V3: C1.2 C2.2 C16.2 IC3.1 L1.2 R1.2 R2.2 R15.2 R16.2 R23.2 | length 63.3
  Top Layer w0.2: L1.2@125.3,55.875 L1.2 128.375,55.875 130.45,57.95 R23.2
  Top Layer w0.3: IC3.1@102.642,73.232 102.642,71.833 102.892,71.583 102.892,70.292 102.775,70.175 102.725,70.175 101.95,69.4 101.95,66.95 ; IC3.1@102.668,73.333 102.625,73.29 IC3.1@102.742,73.173 ; C2.2 C1.2 ; R1.2@103.05,66.7 R1.2 102.2,66.7 ; C1.2@104.525,70.227 104.525,70.204 104.559,70.17 105.255,70.17 106.225,69.2 106.775,69.2 R15.2 R2.2 ; L1.2 125.325,55.95 C16.2 104.3,55.95 101.95,58.3 101.95,66.45 ; 101.95,66.45 102.2,66.7 ; 101.95,66.45 101.95,66.7 ; 101.95,66.7 101.95,66.95 ; 101.95,66.7 102.2,66.7 ; 101.95,66.95 102.2,66.7
+42V: C13.2 C15.2 IC1.5 J4.1 P1.2 Q1.3 R7.1 R27.2 R29.2 | length 80.9
  Top Layer w0.2: P1.2 114.67,59.97 117.7,63 IC1.5
  Top Layer w0.35: IC1.5@123.8,63 124.775,63 125.15,63.375 C15.2 ; C15.2@125.233,65.617 125.233,65.592 125.425,65.4 129.7,65.4 130.5,66.2 130.5,66.263 132.763,66.263 ; Q1.3 132,79 132.763,78.237 132.763,66.263 ; J4.1 164.626,63.176 163.776,63.176 162.7,62.1 162.7,59.2 161.275,57.775 160.025,57.775 159.475,57.225 R29.2 157.713,56.6 155.713,54.6 145.804,54.6 145.416,54.988 141.562,54.988 R27.2 140.55,55.15 139.4,56.3 139.4,59.626 132.763,66.263
+VBAT: C6.1 D4.2 IC2.15 R7.2 | length 19.2
  Top Layer w0.2: C6.1@124.75,67.6 124.883,67.467 124.883,67.017 125.45,66.45 125.724,66.45 125.924,66.25 127.426,66.25 127.476,66.3 R7.2 ; IC2.15 129.1,67.3 128.95,67.15 R7.2 ; v1(129.65,66.307) 128.957,66.307 R7.2 ; v1(131.3,65.4) 137.925,58.775 137.975,58.775 138.325,58.425 D4.2
  Bottom Layer w0.2: v1(129.65,66.307) 130.393,66.307 v1(131.3,65.4)
CHG: IC2.2 Q2.2 | length 8
  Top Layer w0.2: Q2.2 128.75,79.85 128.75,79.25 130,78 130.174,78 130.7,77.474 130.7,74.85 130.1,74.25 IC2.2
ESP_BOOT: IC3.8 P2.4 | length 17.9
  Top Layer w0.2: P2.4 105.82,81.657 113.1,74.377 IC3.8
ESP_RST: C3.2 IC3.2 P2.5 R1.1 | length 24.3
  Top Layer w0.2: P2.5 103.28,82.917 104.125,82.072 104.125,72.965 105.523,71.567 105.523,71.077 v1(105.6,71) ; C3.2 104.45,65.45 R1.1 104.45,66.85 105.526,67.926 105.526,68.226 v1(105.6,68.3)
  Bottom Layer w0.2: v1(105.6,68.3) v1(105.6,71)
GND: C1.1 C2.1 C3.1 C4.1 C5.1 C8.1 C9.1 C11.1 C12.1 C13.1 C15.1 C16.1 C26.1 C27.1 D6.2 D8.2 D9.2 IC1.2 IC2.3 IC3.9 IC3.19 J1.2 J4.11 J5.1 P2.3 Q2.1 Q4.2 Q13.2 R9.1 R12.1 R14.1 R18.1 R24.1 R54.2 Z9.2 | length 21.9
  Top Layer w0.2: IC3.19@109.9,84.1 IC3.19@108.8,84.1 ; R54.2@147.25,88.95 R54.2 Q13.2 ; IC3.19@107.7,83 IC3.19@108.8,83 ; IC3.19@107.7,83 107.7,84.1 IC3.19@108.8,84.1 ; IC3.19@107.7,83 107.7,81.9 IC3.19@108.8,81.9 ; IC3.19@108.8,81.9 IC3.19@108.8,83 ; IC3.19@108.8,81.9 109.9,81.9 109.9,83 IC3.19@108.8,83 ; IC3.19@108.8,83 IC3.19@108.8,84.1
  Top Layer w0.3: v1(102.9,67.8) C2.1 ; v1(104.5,67.8) C1.1 ; IC1.2 126.4,62.85 126.901,62.85 R24.1@127.8,62.85 ; v1(126.4,66.85) 126.4,66.855 126.762,67.217 127.379,67.217 C13.1 ; IC2.3 130.55,73.75 v1(130.6,73.7)
  other v1: 119.3,57.9 104.4,58.7 119,60.2 112.6,61.9 128.8,62.9 129.6,62.9 102.9,64.5 122.1,64.6 108.8,66.2 120.4,69.1 123.6,70.5 123.6,71.6 118,72.6 123.6,72.6 115.7,73.2 118,73.4 135,78.3 126.6,78.9 129.7,80 133.3,80 108.225,80.7 109.325,80.7 129.6,82.3 106.625,82.4 111.025,82.4 137.6,82.7 139.6,82.7 138.6,82.75 106.625,83.6 111.025,83.6 116.8,84.6 108.325,85.2 109.325,85.2 142.8,86.2 165.6,87.6 167,87.6 148.2,88.3 151.9,88.9 165.6,89 167,89 142.8,89.9 165.6,90.2 167,90.2
GPIO8: IC3.7 R2.1 | length 2.6
  Top Layer w0.2: R2.1 IC3.7@111.525,73.29
KEEP_ON: D2.1 D6.1 D10.1 IC1.4 | length 20.6
  Top Layer w0.2: D10.1 108.775,64.125 D6.1 D6.1@108.85,64.1 ; D2.1 108.9,64.05 D6.1@108.85,64.1 ; IC1.4 119.787,63.95 119.237,63.4 111.2,63.4 110.5,64.1 D6.1@108.85,64.1
LED: IC3.10 R17.1 | length 2.7
  Top Layer w0.2: IC3.10 115.51,90.79 116.65,89.65 R17.1 ; R17.1@116.8,89.675 R17.1@116.875,89.675
NetC7_1: C7.1 IC2.11 IC2.12 IC2.14 | length 7
  Top Layer w0.2: C7.1@126,67.55 126,67.645 126.3,67.945 126.583,67.945 126.888,68.25 IC2.14 130.05,68.25 130.261,68.461 130.261,69.039 130.05,69.25 IC2.12 IC2.11
NetC8_2: C8.2 IC2.7 | length 3.6
  Top Layer w0.2: C8.2 126.083,72.667 126.533,72.667 127.45,71.75 IC2.7
NetC14_1: C14.1 IC1.1 | length 3
  Top Layer w0.2: IC1.1@126.3,62.05 127.65,62.05 127.85,61.85 C14.1
NetC14_2: C14.2 D9.1 IC1.6 L1.1
NetC17_1: C17.1 C19.2 IC2.23 R28.1 R30.1 | length 15.8
  Top Layer w0.2: IC2.23 138.45,71.25 141.45,74.25 C17.1 145.95,74.25 145.95,76.05 144.4,76.05 C19.2
NetC17_2: C17.2 D3.1 IC2.22 R25.1 | length 12.8
  Top Layer w0.2: IC2.22 138.85,70.75 140.475,72.375 141.05,72.375 D3.1 144.275,72.725 C17.2 144.3,72.15 145.167,71.283 145.817,71.283 R25.1
NetC18_1: C18.1 C20.2 IC2.17 R31.1 R33.1 | length 20.9
  Top Layer w0.2: IC2.17 135.85,68.25 137.4,66.7 137.4,64.9 142.5,59.8 142.5,58.1 143.1,57.5 C20.2 145.9,57.5 145.95,57.55 145.95,55.85 C18.1@144.3,55.85
NetC18_2: C18.2 D4.1 IC2.16 R27.1 | length 15.6
  Top Layer w0.2: IC2.16 134.9,64.975 141.1,58.775 141.125,58.775 141.475,58.425 D4.1 141.4,58.325 R27.1 142.1,56.65 C18.2
NetC19_1: C19.1 C21.2 IC2.24 R34.1 R36.1 | length 17.2
  Top Layer w0.2: IC2.24 137.75,71.75 143.65,77.65 C19.1 145.75,77.65 145.95,77.85 145.95,79.75 145.85,79.85 C21.2
NetC20_1: C20.1 C22.2 IC2.18 R37.1 R39.1 | length 18.6
  Top Layer w0.2: IC2.18 136.35,68.75 138.25,66.85 138.25,65.55 142.45,61.35 C22.2 144.4,61.25 R37.1 R39.1 ; C20.1 145.675,59 145.95,59.275 R39.1@145.95,59.35
NetC21_1: C21.1 C23.2 IC2.25 R40.1 R42.1 | length 19.6
  Top Layer w0.2: IC2.25 137.15,72.25 143,78.1 143,80.05 C21.1 144.5,81.55 R42.1 145.95,81.55 145.95,83.45 144.4,83.45 C23.2
NetC22_1: C22.1 C24.2 IC2.19 R43.1 R45.1 | length 17.1
  Top Layer w0.2: IC2.19 137,69.25 139.25,67 139.25,65.95 140.15,65.05 C24.2 144.4,64.95 R43.1 ; C22.1 145.75,62.85 R45.1@145.95,63.05 ; R45.1 R43.1 ; R43.1@145.95,64.95 R43.1
NetC23_1: C23.1 C26.2 IC2.26 R46.1 R48.1 | length 23
  Top Layer w0.2: IC2.26 136.65,72.75 142.3,78.4 142.3,83.9 143.45,85.05 C23.1 145.75,85.05 145.95,85.25 145.95,87.15 145.9,87.1 C26.2
NetC24_1: C24.1 C25.2 IC2.20 R49.1 R51.1 | length 16.7
  Top Layer w0.2: IC2.20 137.65,69.75 140.2,67.2 140.2,66.1 140.6,65.7 142.675,65.7 143.525,66.55 C24.1 R51.1@145.75,66.55 ; R51.1 R49.1
  Top Layer w0.3: C24.1 144.375,66.625 144.375,67.825 C25.2 ; R51.1@145.75,66.55 R51.1@145.95,66.75
NetC27_2: C27.2 IC2.27 R52.1 R54.1 | length 26.1
  Top Layer w0.2: IC2.27 136.05,73.25 141.6,78.8 141.6,87.6 142.95,88.95 R54.1 ; C27.2 145.95,90.85 R54.1@145.95,88.95
NetC28_1: C28.1 IC2.21 R55.1 R56.1 | length 15.2
  Top Layer w0.2: IC2.21 139.65,70.25 140.2,70.8 143.55,70.8 C28.1 145.7,69.9 R56.1 ; R56.1@145.85,69.9 146.6,70.65 146.6,72 146.15,72.45 146,72.45 145.85,72.6 R55.1
NetD1_1: D1.1 Q2.3 R10.1 | length 5.2
  Top Layer w0.2: R10.1 123.25,81.25 124.225,82.225 124.45,82.225 124.8,82.575 D1.1@124.825,82.55 ; D1.1 127.4,82.275 127.6,82.475 Q2.3
NetD1_2: D1.2 Q3.1 R10.2 R11.1 | length 22.8
  Top Layer w0.2: R10.2 R11.1 121.55,79.8 120.6,79.8 119.9,80.5 119.9,83 118.4,84.5 118.4,88.3 120.37,90.27 Q3.1 ; R10.2@123.175,79.825 123.875,79.125 D1.2
NetD2_2: D2.2 D7.2 R3.2 | length 4.5
  Top Layer w0.2: D7.2 106.225,58.3 107.5,58.3 107.675,58.125 D2.2 108.925,58.1 R3.2
NetD5_1: D5.1 IC3.5 | length 12
  Top Layer w0.2: IC3.5@108.625,73.29 108.625,74.225 109.1,74.7 111.928,74.7 112.35,74.278 112.35,71.95 113.5,70.8 D5.1 D5.1@116.45,70.825
NetD10_2: D10.2 IC3.17 | length 24.5
  Top Layer w0.2: IC3.17 104.1,89.5 104.45,89.15 104.45,87.7 104.9,87.25 104.9,76.3 v1(106.3,74.9) ; v1(106.4,68.35) 106.4,67.375 D10.2
  Bottom Layer w0.2: v1(106.3,74.9) 106.35,74.85 106.35,68.4 v1(106.4,68.35)
NetIC1_3: IC1.3 R23.1 R24.2 | length 2.9
  Top Layer w0.2: IC1.3@126.3,63.95 126.36,64.009 127.058,64.009 127.175,64.127 127.577,64.127 127.8,64.35 128.8,64.35 R23.1
NetIC2_4: IC2.4 IC3.4 R16.1 | length 27.2
  Top Layer w0.2: IC3.4@107.125,73.29 107.398,73.017 107.398,72.327 108.133,71.592 ; 108.436,71.289 108.392,71.333 ; R16.1@108.575,70.4 108.575,71.15 108.392,71.333 ; v1(127.6,74.5) 127.984,74.116 127.984,73.51 128.194,73.3 129.05,73.3 IC2.4 ; 108.133,71.592 108.298,71.427 ; 108.133,71.592 108.298,71.592 108.392,71.592 ; 108.298,71.427 108.298,71.498 108.392,71.592 ; 108.298,71.427 108.392,71.333 ; 108.392,71.333 108.392,71.427 108.392,71.498 108.392,71.592 ; 108.392,71.592 v1@108.623,71.823 ; v1@108.623,71.823 v1(108.7,71.9) v1@108.623,71.823
  Bottom Layer w0.2: v1(108.7,71.9) 108.75,71.95 118.85,71.95 121.4,74.5 v1(127.6,74.5)
NetIC2_5: IC2.5 IC3.3 R15.1 | length 27.8
  Top Layer w0.2: IC3.3@105.525,73.29 105.525,72.45 106.6,71.375 ; R15.1@106.825,70.45 106.825,71.15 ; v1(107.413,71.388) 107.006,71.388 ; v1(127.2,73.8) 127.2,73.711 128.161,72.75 IC2.5 ; 106.6,71.375 106.6,71.388 107.006,71.388 ; 106.6,71.375 106.825,71.15 ; 106.825,71.15 107.006,71.331 107.006,71.388
  Bottom Layer w0.2: v1(107.413,71.388) 107.521,71.388 107.662,71.246 119.416,71.246 121.97,73.8 v1(127.2,73.8)
NetIC2_30: IC2.30 IC3.6 R9.2 | length 33.3
  Top Layer w0.2: IC3.6@110.075,73.34 110.125,73.29 110.125,70.575 110.8,69.9 117.3,69.9 118.4,71 124.9,77.5 128,77.5 v1(128.5,78) ; v1(134.1,76.1) R9.2@135,76.1 ; IC2.30 R9.2@134.9,76
  Bottom Layer w0.2: v1(128.5,78) 132.2,78 v1(134.1,76.1)
NetJ9_1: J9.1 Q4.3 | length 4.4
  Top Layer w0.2: Q4.3 119.4,74.2 121.4,76.2 J9.1
NetP1_1: P1.1 R3.1 | length 2.6
  Top Layer w0.2: R3.1 112.25,58 112.9,58 113.47,57.43 P1.1
NetQ1_1: Q1.1 R5.1 | length 9.1
  Top Layer w0.2: R5.1@122.6,73.65 R5.1@122.65,73.7 ; R5.1 122.75,73.75 125.8,76.8 Q1.1 129.75,76.7 Q1.1@129.35,76.3
NetQ4_1: Q4.1 R17.2 R18.2 | length 16.5
  Top Layer w0.2: R17.2 116.8,87.075 116.925,87.075 117.15,86.85 117.15,86.725 117.675,86.2 117.675,84.525 119.2,83 119.2,75.2 118.45,74.45 Q4.1
NetQ5_1: Q5.1 R28.2 Z1.1 | length 3.6
  Top Layer w0.2: R28.2@147.25,76.05 Q5.1
NetQ5_3: Q5.3 R26.1 | length 1.7
  Top Layer w0.3: Q5.3 R26.1
NetQ6_1: Q6.1 R31.2 Z2.1 | length 3.6
  Top Layer w0.2: R31.2@147.25,57.55 Q6.1
NetQ6_3: Q6.3 R29.1 | length 1.7
  Top Layer w0.3: Q6.3 R29.1
NetQ7_1: Q7.1 R34.2 Z3.1 | length 3.6
  Top Layer w0.2: R34.2@147.25,79.75 Q7.1
NetQ7_3: Q7.3 R32.1 | length 1.7
  Top Layer w0.3: Q7.3 R32.1
NetQ8_1: Q8.1 R37.2 Z4.1 | length 3.6
  Top Layer w0.2: R37.2@147.25,61.25 Q8.1
NetQ8_3: Q8.3 R35.1 | length 1.7
  Top Layer w0.3: Q8.3 R35.1
NetQ9_1: Q9.1 R40.2 Z5.1 | length 3.6
  Top Layer w0.2: R40.2@147.25,83.45 Q9.1
NetQ9_3: Q9.3 R38.1 | length 1.7
  Top Layer w0.3: Q9.3 R38.1
NetQ10_1: Q10.1 R43.2 Z6.1 | length 3.6
  Top Layer w0.2: R43.2@147.25,64.95 Q10.1
NetQ10_3: Q10.3 R41.1 | length 1.7
  Top Layer w0.3: Q10.3 R41.1
NetQ11_1: Q11.1 R46.2 Z7.1 | length 3.6
  Top Layer w0.2: R46.2@147.25,87.15 Q11.1
NetQ11_3: Q11.3 R44.1 | length 1.7
  Top Layer w0.3: Q11.3 R44.1
NetQ12_1: Q12.1 R49.2 Z8.1 | length 3.9
  Top Layer w0.2: R49.2 148.05,68.25 148.437,68.637 149.2,68.637 Z8.1 ; Z8.1@149.2,68.65 Q12.1
NetQ12_3: Q12.3 R47.1 | length 1.7
  Top Layer w0.3: Q12.3 R47.1
NetQ13_1: Q13.1 R52.2 Z9.1 | length 3.6
  Top Layer w0.2: R52.2@147.25,90.85 Q13.1
NetQ13_3: Q13.3 R50.1 | length 1.7
  Top Layer w0.3: Q13.3 R50.1
NetQ14_1: Q14.1 R55.2 Z10.1 | length 3.8
  Top Layer w0.2: R55.2@147.25,72.75 147.3,72.7 148.1,72.7 148.45,72.35 Q14.1
NetQ14_3: Q14.3 R53.1 | length 1.7
  Top Layer w0.3: Q14.3 R53.1
P_SENSE: D7.1 D8.1 IC3.18 | length 33
  Top Layer w0.2: IC3.18 102.6,89.293 102.071,88.763 102.071,76.029 v1(103.4,74.7) ; v1(103.7,67.8) 103.7,63.6 103.3,63.2 D8.1 103.4,61.9 104.4,61.9 104.825,61.475 D7.1
  Bottom Layer w0.2: v1(103.4,74.7) 103.4,74.683 103.7,74.383 v1(103.7,67.8)
PACK-: J6.1 Q3.3 R11.2 | length 10.2
  Top Layer w0.2: R11.2 J6.1
  Top Layer w1: J6.1 121.9,86 126.2,86 Q3.3
REGO: C4.2 IC2.8 | length 3.6
  Top Layer w0.2: C4.2@125.669,71.7 126.7,71.7 127.15,71.25 IC2.8
RSNS_P: Q3.2 R13.1 R14.2 | length 10.3
  Top Layer w0.2: R13.1 133.05,87.737 Q3.2
  Top Layer w1: Q3.2 134.363,89.05 R14.2
RX: IC3.11 P2.1 | length 2.7
  Top Layer w0.2: IC3.11 113.1,89.7 113.4,89.4 113.4,88.24 P2.1
SERV_SIG: IC3.15 J7.1 J7.2 J7.3 | length 21
  Top Layer w0.2: IC3.15 107.1,87.6 108.3,86.4 110.08,86.4 114.44,82.04 J7.1 J7.2 J7.3
SRN: C10.2 C12.2 IC2.29 R13.2 | length 11.1
  Top Layer w0.2: R13.2 C12.2 134.55,79.65 136.225,77.975 136.225,74.525 135.95,74.25 IC2.29
SRP: C10.1 C11.2 IC2.28 R12.2 | length 11.5
  Top Layer w0.2: C10.1 R12.2 131.9,82.15 131.9,80.9 131.9,80.1 133.37,78.63 133.37,74.14 133.76,73.75 IC2.28
TS1: D5.2 IC2.6 J1.1 | length 21.2
  Top Layer w0.2: J1.1 116.15,68.3 117.1,68.3 119.225,70.425 119.25,70.425 119.6,70.775 D5.2 119.925,71.125 120.225,71.125 122.1,73 123.1,73 123.8,73.7 126.451,73.7 127.901,72.25 IC2.6
TS2: IC2.13 J2.1 | length 13.5
  Top Layer w0.2: J2.1 119.7,64.5 123.7,68.5 126.572,68.5 126.822,68.75 IC2.13
TX: IC3.12 P2.2 | length 2.9
  Top Layer w0.2: P2.2 110.9,88.356 111.6,89.056 IC3.12
VC5X: C6.2 C7.2 C9.2 C25.1 C28.2 D3.2 IC2.10 J2.2 R5.2 R8.1 | length 35.2
  Top Layer w0.2: J2.2 121,66.5 122.95,68.45 C9.2 122.95,70.55 122.6,70.9 R5.2@122.6,72.05 ; R5.2@122.3,72.35 R5.2@122.6,72.05 ; R5.2 R5.2@122.6,72.05 ; C9.2@123,69.25 123.15,69.1 123.35,69.1 124.75,69.1 126,69.1 126.083,69.183 126.583,69.183 127.65,70.25 IC2.10 131.36,70.25 131.81,69.8 v1(131.9,69.8) ; v1(138.7,69.6) 141.375,69.6 D3.2 141.4,67.9 C25.1 142.975,67.9 C28.2@142.975,69.9
  Bottom Layer w0.2: v1(131.9,69.8) 138.392,69.8 138.592,69.6 v1(138.7,69.6)
pads on no net: IC2.1 IC3.13 IC3.14 IC3.16

## Polygon pours and split planes (outlines as drawn)
GND on Top Layer "GND_L01_P003" (solid, pour order 3): 95,92.9 95,53.4 171.5,53.4 171.5,92.9
NetC14_2 on Top Layer "NETC14_2_L01_P000" (solid, pour order 0): 129.636,61.239 125.786,61.239 125,62.025 124.525,62.5 120.7,62.5 119.55,61.35 119.55,58.95 120.6,57.9 129.6,57.9 130.07,58.37 130.07,60.805
GND on Bottom Layer "GND_L02_P004" (solid, pour order 4): 171.95,93 171.95,53.3 95,53.3 95,93

## Keep-outs
Keep-Out Layer:
  rectangle: 94.5,53 101.6,94.2

## Silkscreen, mask and mechanical layers (free items; w line width, h text height)
Top Overlay:
  text "P-" at 120.33,88.938 h1.52
  text "B-" at 170.462,87.23 h1.52 r90
  text "-" at 123.55,77.55 h1 r180
  text "+" at 166.217,59.85 h1 r90
  text "Tim Billiet" at 129.352,54.9 h1
Bottom Overlay:
  text "GND" at 108.7,86.466 h0.8 r90
  text "TX" at 111.3,86.466 h0.8 r90
  text "BOOT" at 106.22,86.395 h0.8 r90
  text "RST" at 103.6,86.366 h0.8 r90
  text "RX" at 113.8,86.366 h0.8 r90
Mechanical 1:
  lines w0.15: 95.6,55.37 ccw(c96.87,55.37) 96.87,54.1 99.2,54.1 167.3,54.1 169.73,54.1 ccw(c169.73,55.37) 171,55.37 171,57.8 171,89.6 171,91.13 ccw(c169.73,91.13) 169.73,92.4 168.2,92.4 98.2,92.4 96.87,92.4 ccw(c96.87,91.13) 95.6,91.13 95.6,89.8 95.6,57.7 95.6,55.37